# Altium PCB filtroFinal.PcbDoc
Units mm, origin at the board's own origin, x right, y up, seen from the top; angles counter-clockwise.
Board outline 152.4 x 101.6 mm, 2 copper layers (Top Layer, Bottom Layer); 131 components, 101 nets, 357 pads, 43 vias.
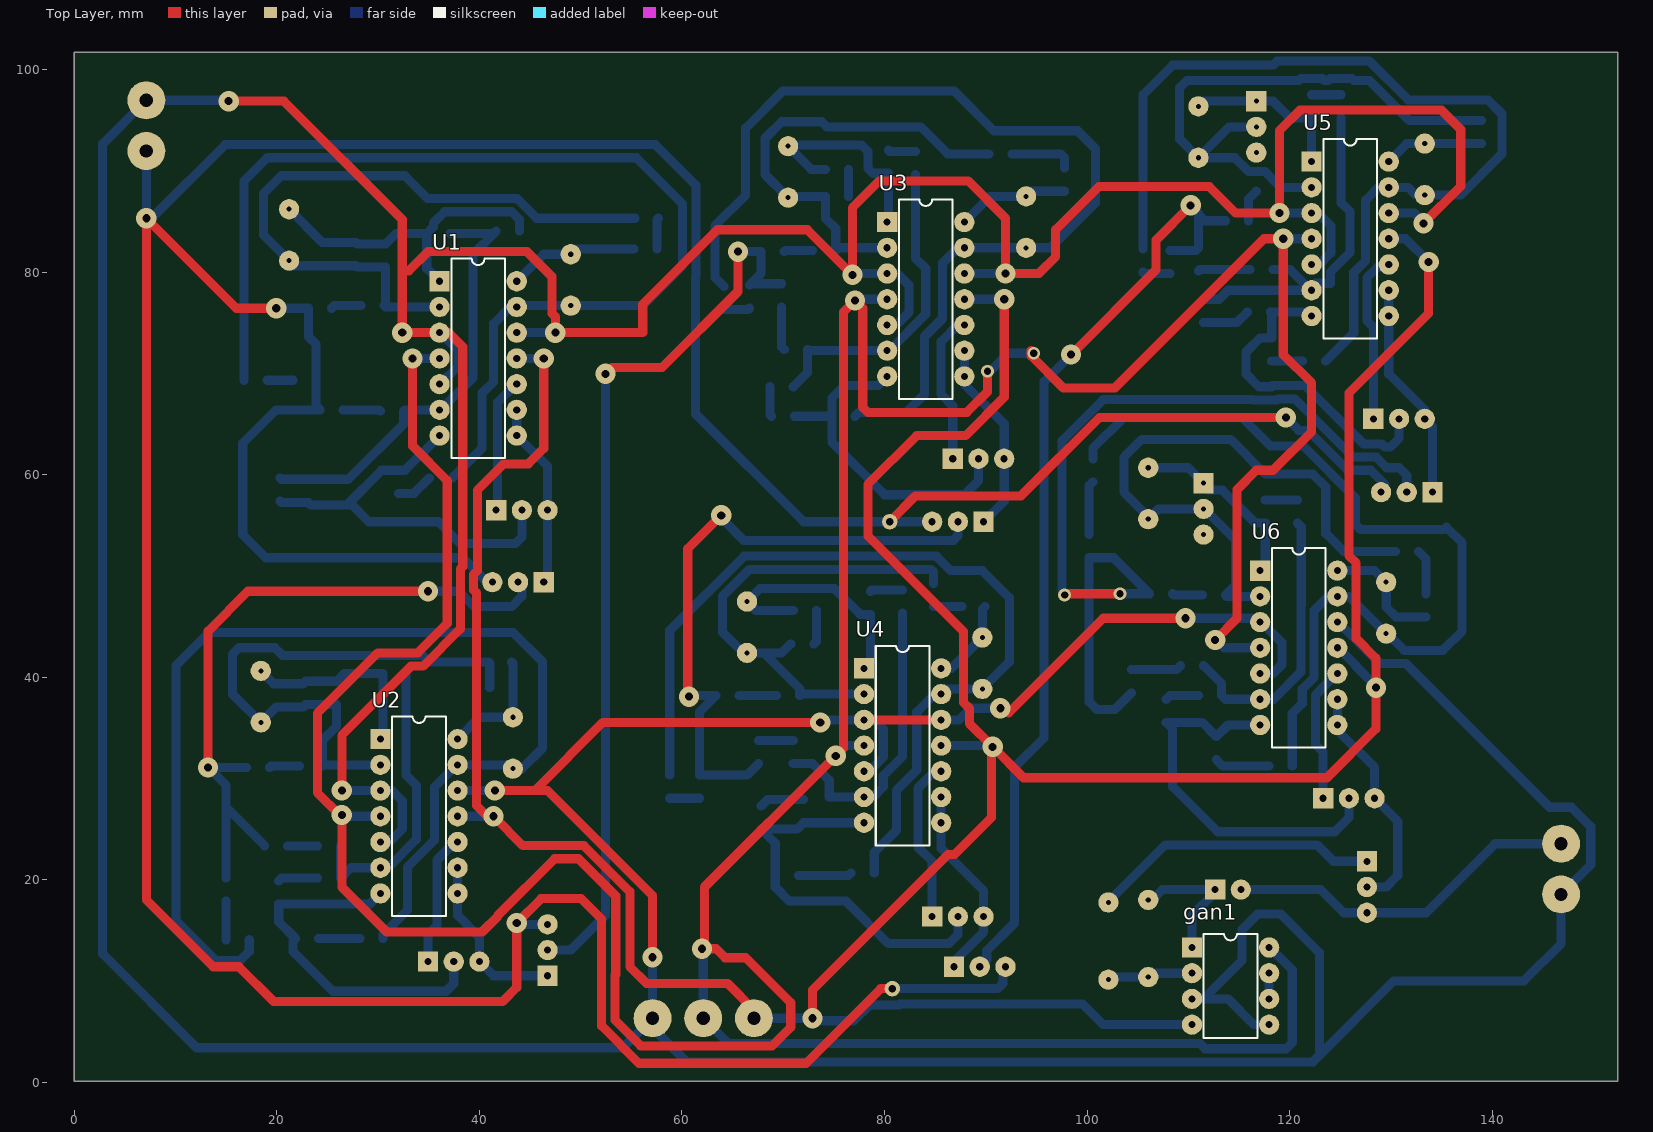
[diagram p0: Top Layer view]
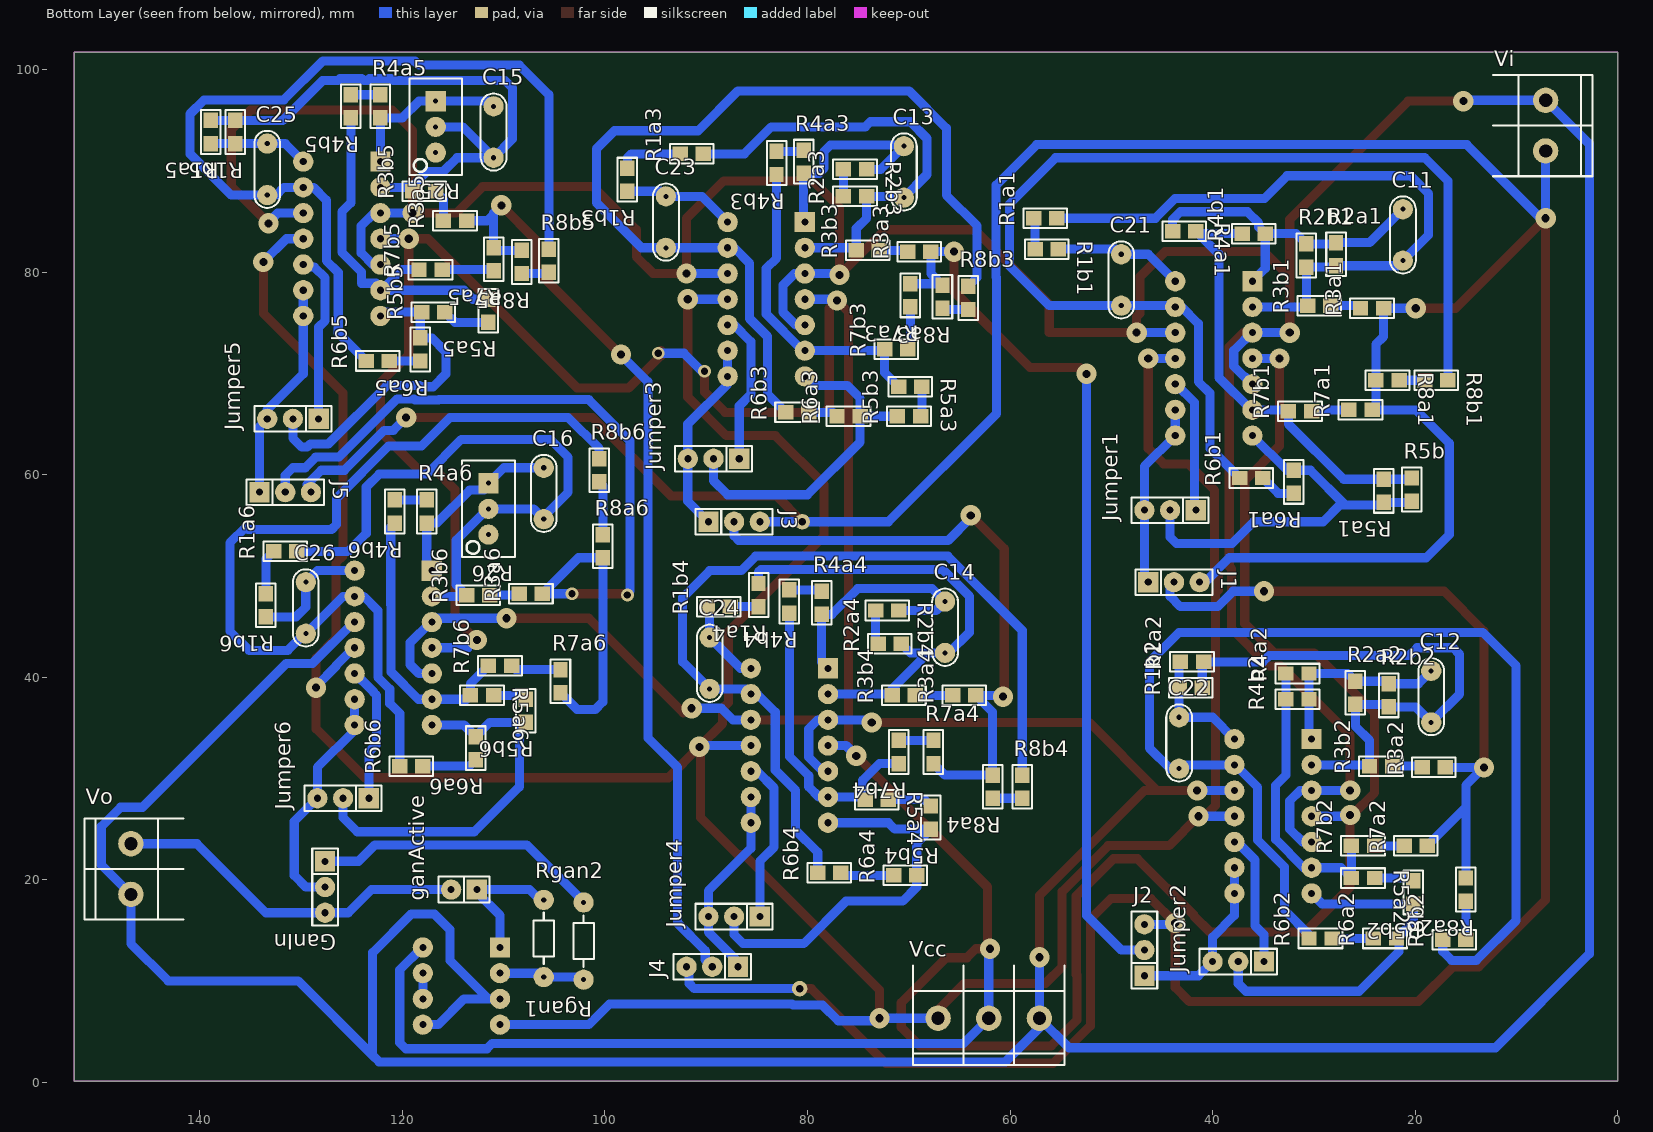
[diagram p1: Bottom Layer view, seen from below]
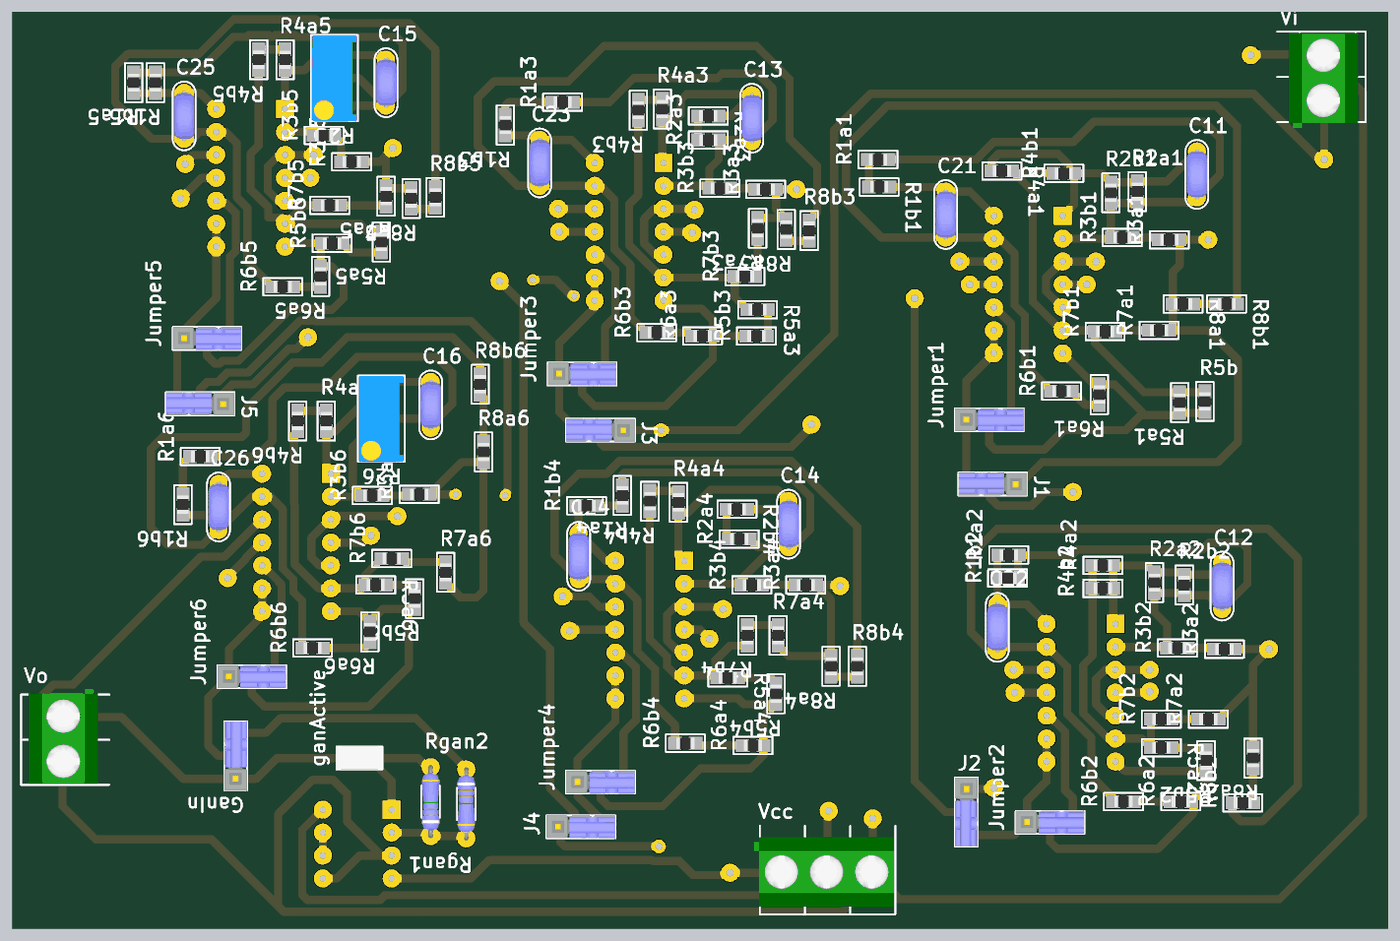
[diagram p2: 3D render of the assembled board from below, using the file's embedded part models]

## Layer stack, top to bottom
Top Solder: solder mask 0.0102, Solder Resist, Dk 3.5
Top Layer: signal copper 0.0356
Dielectric 1: dielectric 0.32, FR-4, Dk 4.8
Bottom Layer: signal copper 0.0356
Bottom Solder: solder mask 0.0102, Solder Resist, Dk 3.5

## Board outline
0,0.127 152.4,0.127 152.4,101.727 0,101.727

## Design rules (kind name [scope] priority, off if disabled: settings)
Clearance [All] p1: gap=0.4 ignorepadtopadclearanceinfootprint=FALSE
PolygonConnect [All] p1: connectstyle=Relief reliefconductorwidth=0.254 reliefentries=4 polygonreliefangle="90 Angle" airgapwidth=0.254
RoutingVias [All] p1: holewidth=0.4 width=2 viastyle="Through Hole" minholewidth=0.3 minwidth=1.8 maxholewidth=0.5 maxwidth=2
SolderMaskExpansion [All] p1: expansion=0.102
Width [All] p1: maxlimit=0.9 minlimit=0.8 preferedwidth=0.9
30 further rules are at their usual default settings.

## Classes and differential pairs
component class filtroFinal-TC: gan1 ganActive GanIn J1 J2 J3 J4 J5 Rgan1 Rgan2 Vcc Vi Vo
component class "Etapa 6": C16 C26 Jumper6 R1a6 R1b6 R3a6 R3b6 R4a6 R4b6 R5a6 R5b6 R6a6 R6b6 R7a6 R7b6 R8a6 R8b6 R26 U6
component class "Etapa 5": C15 C25 Jumper5 R1a5 R1b5 R3a5 R3b5 R4a5 R4b5 R5a5 R5b5 R6a5 R6b5 R7a5 R7b5 R8a5 R8b5 R25 U5
component class "Etapa 4": C14 C24 Jumper4 R1a4 R1b4 R2a4 R2b4 R3a4 R3b4 R4a4 R4b4 R5a4 R5b4 R6a4 R6b4 R7a4 R7b4 R8a4 R8b4 U4
component class "Etapa 3": C13 C23 Jumper3 R1a3 R1b3 R2a3 R2b3 R3a3 R3b3 R4a3 R4b3 R5a3 R5b3 R6a3 R6b3 R7a3 R7b3 R8a3 R8b3 U3
component class "Etapa 2": C12 C22 Jumper2 R1a2 R1b2 R2a2 R2b2 R3a2 R3b2 R4a2 R4b2 R5a2 R5b2 R6a2 R6b2 R7a2 R7b2 R8a2 R8b2 U2
component class "Etapa 1": C11 C21 Jumper1 R1a1 R1b1 R2a1 R2b1 R3a1 R3b1 R4a1 R4b1 R5a1 R5b R6a1 R6b1 R7a1 R7b1 R8a1 R8b1 U1

## Components (designator, comment, footprint, x,y, rotation, side; value= is the part's Value field where it differs from the comment)
C11 "CAP" CAP200 21.209,83.693 r90 bottom
C12 "CAP" CAP200 18.415,38.1 r90 bottom
C13 "CAP" CAP200 70.485,89.916 r90 bottom
C14 "CAP" CAP200 66.421,44.958 r90 bottom
C15 "CAP" CAP200 110.998,93.853 r90 bottom
C16 "CAP" CAP200 106.045,58.166 r90 bottom
C21 "CAP" CAP200 49.022,79.248 r90 bottom
C22 "CAP" CAP200 43.307,33.528 r90 bottom
C23 "CAP" CAP200 93.98,84.963 r90 bottom
C24 "CAP" CAP200 89.662,41.402 r90 bottom
C25 "CAP" CAP200 133.35,90.17 r90 bottom
C26 "CAP" CAP200 129.54,46.863 r90 bottom
gan1 "TL082JG" JG008 114.173,9.525 r270 top
ganActive "JUMPER" JUMPER2 113.919,19.05 r0 bottom
GanIn "JUMPER" JUMPER3 127.635,19.304 r270 bottom
J1 "JUMPER" JUMPER3 43.815,49.403 r180 bottom
J2 "JUMPER" JUMPER3 46.736,13.081 r90 bottom
J3 "JUMPER" JUMPER3 87.249,55.372 r180 bottom
J4 "JUMPER" JUMPER3 89.408,11.43 r0 bottom
J5 "JUMPER" JUMPER3 131.572,58.293 r180 bottom
Jumper1 "JUMPER" JUMPER3 44.196,56.515 r0 bottom
Jumper2 "JUMPER" JUMPER3 37.465,11.938 r0 bottom
Jumper3 "JUMPER" JUMPER3 89.281,61.595 r0 bottom
Jumper4 "JUMPER" JUMPER3 87.249,16.383 r0 bottom
Jumper5 "JUMPER" JUMPER3 130.81,65.532 r0 bottom
Jumper6 "JUMPER" JUMPER3 125.857,28.067 r0 bottom
R1a1 "RES" 0805 56.515,85.344 r0 bottom
R1a2 "RES" 0805 42.037,41.529 r0 bottom
R1a3 "RES" 0805 91.44,91.694 r0 bottom
R1a4 "RES" 0805 84.836,48.133 r270 bottom
R1a5 "RES" 0805 138.938,93.853 r270 bottom
R1a6 "RES" 0805 131.572,52.451 r0 bottom
R1b1 "RES" 0805 56.388,82.296 r180 bottom
R1b2 "RES" 0805 42.164,38.989 r0 bottom
R1b3 "RES" 0805 97.79,89.154 r270 bottom
R1b4 "RES" 0805 88.773,46.99 r0 bottom
R1b5 "RES" 0805 136.525,93.853 r270 bottom
R1b6 "RES" 0805 133.477,47.117 r270 bottom
R2a1 "RES" 0805 27.813,81.788 r90 bottom
R2a2 "RES" 0805 25.908,38.481 r90 bottom
R2a3 "RES" 0805 75.311,87.503 r0 bottom
R2a4 "RES" 0805 71.882,43.307 r0 bottom
R2b1 "RES" 0805 30.734,81.661 r90 bottom
R2b2 "RES" 0805 22.606,38.227 r90 bottom
R2b3 "RES" 0805 75.311,90.17 r180 bottom
R2b4 "RES" 0805 72.136,46.609 r180 bottom
R3a1 "RES" 0805 24.257,76.454 r0 bottom
R3a2 "RES" 0805 18.161,31.115 r0 bottom
R3a3 "RES" 0805 68.961,82.042 r0 bottom
R3a4 "RES" 0805 64.516,38.227 r0 bottom
R3a5 "RES" 0805 114.808,85.09 r0 bottom
R3a6 "RES" 0805 107.315,48.26 r0 bottom
R3b1 "RES" 0805 29.464,76.708 r0 bottom
R3b2 "RES" 0805 23.368,31.242 r0 bottom
R3b3 "RES" 0805 74.041,82.169 r0 bottom
R3b4 "RES" 0805 70.485,38.227 r0 bottom
R3b5 "RES" 0805 117.856,88.011 r0 bottom
R3b6 "RES" 0805 112.522,48.133 r0 bottom
R4a1 "RES" 0805 42.799,84.074 r180 bottom
R4a2 "RES" 0805 31.623,40.386 r0 bottom
R4a3 "RES" 0805 80.391,90.932 r90 bottom
R4a4 "RES" 0805 78.613,47.371 r90 bottom
R4a5 "RES" 0805 122.174,96.393 r90 bottom
R4a6 "RES" 0805 117.602,56.388 r90 bottom
R4b1 "RES" 0805 35.941,83.82 r0 bottom
R4b2 "RES" 0805 31.623,37.846 r0 bottom
R4b3 "RES" 0805 83.058,90.805 r270 bottom
R4b4 "RES" 0805 81.788,47.498 r270 bottom
R4b5 "RES" 0805 125.095,96.393 r270 bottom
R4b6 "RES" 0805 120.777,56.388 r270 bottom
R5a1 "RES" 0805 23.114,58.42 r270 bottom
R5a2 "RES" 0805 25.146,20.193 r180 bottom
R5a3 "RES" 0805 69.85,68.707 r180 bottom
R5a4 "RES" 0805 73.152,27.94 r180 bottom
R5a5 "RES" 0805 111.506,76.2 r270 bottom
R5a6 "RES" 0805 112.141,38.227 r180 bottom
R5b "RES" 0805 20.32,58.547 r270 bottom
R5b2 "RES" 0805 20.193,18.774 r270 bottom
R5b3 "RES" 0805 69.977,65.786 r0 bottom
R5b4 "RES" 0805 67.818,26.162 r270 bottom
R5b5 "RES" 0805 116.967,76.073 r0 bottom
R5b6 "RES" 0805 107.823,36.703 r270 bottom
R6a1 "RES" 0805 32.004,59.309 r270 bottom
R6a2 "RES" 0805 22.987,14.224 r0 bottom
R6a3 "RES" 0805 75.946,65.786 r0 bottom
R6a4 "RES" 0805 70.358,20.447 r0 bottom
R6a5 "RES" 0805 118.237,72.39 r270 bottom
R6a6 "RES" 0805 112.776,33.02 r270 bottom
R6b1 "RES" 0805 36.195,59.69 r0 bottom
R6b2 "RES" 0805 29.337,14.224 r0 bottom
R6b3 "RES" 0805 81.026,66.167 r0 bottom
R6b4 "RES" 0805 77.851,20.701 r0 bottom
R6b5 "RES" 0805 122.428,71.247 r0 bottom
R6b6 "RES" 0805 119.126,31.242 r0 bottom
R7a1 "RES" 0805 25.4,66.421 r0 bottom
R7a2 "RES" 0805 19.939,23.368 r0 bottom
R7a3 "RES" 0805 69.85,77.724 r270 bottom
R7a4 "RES" 0805 67.564,32.639 r90 bottom
R7a5 "RES" 0805 110.998,81.28 r270 bottom
R7a6 "RES" 0805 104.394,39.624 r90 bottom
R7b1 "RES" 0805 31.369,66.294 r0 bottom
R7b2 "RES" 0805 25.146,23.368 r0 bottom
R7b3 "RES" 0805 71.247,72.39 r0 bottom
R7b4 "RES" 0805 70.993,32.639 r270 bottom
R7b5 "RES" 0805 117.221,80.264 r0 bottom
R7b6 "RES" 0805 110.363,41.148 r0 bottom
R8a1 "RES" 0805 22.733,69.342 r180 bottom
R8a2 "RES" 0805 14.986,19.05 r270 bottom
R8a3 "RES" 0805 66.675,77.597 r270 bottom
R8a4 "RES" 0805 61.722,29.21 r270 bottom
R8a5 "RES" 0805 108.204,81.026 r270 bottom
R8a6 "RES" 0805 100.203,52.959 r90 bottom
R8b1 "RES" 0805 17.907,69.342 r180 bottom
R8b2 "RES" 0805 16.129,14.097 r0 bottom
R8b3 "RES" 0805 64.135,77.47 r90 bottom
R8b4 "RES" 0805 58.801,29.21 r90 bottom
R8b5 "RES" 0805 105.537,81.153 r90 bottom
R8b6 "RES" 0805 100.584,60.452 r90 bottom
R25 "PRESET" "PRESET V" 116.713,94.361 r270 bottom
R26 "PRESET" "PRESET V" 111.506,56.642 r270 bottom
Rgan1 "RES" RES300 102.108,17.78 r270 bottom
Rgan2 "RES" RES300 106.045,10.414 r90 bottom
U1 "TL084N" N014 39.878,71.501 r270 top
U2 "TL084N" N014 34.036,26.289 r270 top
U3 "TL084N" N014 84.074,77.343 r270 top
U4 "TL084N" N014 81.788,33.274 r270 top
U5 "TL084N" N014 125.984,83.312 r270 top
U6 "TL084N" N014 120.904,42.926 r270 top
Vcc "BORNERA 3" BORNERA3 62.103,6.35 r90 bottom
Vi "BORNERA 2" BORNERA2 7.112,94.488 r0 bottom
Vo "BORNERA 2" BORNERA2 146.812,21.082 r180 bottom

## Footprints (in the part's own frame and the unit in brackets; to place one, negate y for a bottom-side part, rotate by r counter-clockwise, add the part's x,y. Pads: shape width x height; smd on the part's side, far side on the other; paste and mask are expansions set on the pad)
0805 [mil] "Pasivo 0805"
  rect 60x56 smd: 1(-45,0) 2(45,0)
  silkscreen extent -85,-38 85,38, body extent -40,-24 39,25, height 15
BORNERA2 [mm] "Bornera con Tornillos 5mm separación"
  round 2.5 / inner round 3.75 / far side round 3.75 hole 1.3: 1(0,2.5) 2(0,-2.5)
  silkscreen extent -4.6,-5 5.2,5, body extent -3.76,-4.89 3.94,5.61, height 10
BORNERA3 [mm] "Bornera con Tornillos 5mm separación"
  round 2.5 / inner round 3.75 / far side round 3.75 hole 1.3: 1(0,5) 2(0,0) 3(0,-5)
  silkscreen extent -4.6,-7.5 5.2,7.5, body extent -3.76,-7.39 3.94,8.11, height 10.05
CAP200 [mm]
  round 2 hole 0.5: 1(-2.54,0) 2(2.54,0)
  silkscreen extent -3.81,-1.27 3.81,1.27, body extent -2.79,-1.17 2.79,1.12, height 6.24
JG008 [mm] "DIP; 8 Leads; Row Spacing 7.62 mm; Pitch 2.54 mm"
  rect 2x2 hole 0.7: 1(-3.81,-3.81)
  round 2 hole 0.7: 2(-1.27,-3.81) 3(1.27,-3.81) 4(3.81,-3.81) 5(3.81,3.81) 6(1.27,3.81) 7(-1.27,3.81) 8(-3.81,3.81)
  silkscreen extent -5.15,-2.65 5.15,2.65
JUMPER2 [mm]
  rect 2x2 hole 0.7: 1(-1.27,0)
  round 2 hole 0.7: 2(1.27,0)
  silkscreen extent -2.54,-1.27 2.54,1.27, body extent -2.46,-1.27 2.54,1.27, height 9.5
JUMPER3 [mm]
  rect 2x2 hole 0.7: 1(-2.54,0)
  round 2 hole 0.7: 2(0,0) 3(2.54,0)
  silkscreen extent -3.81,-1.27 3.81,1.27, body extent -3.81,-1.3 3.81,1.27, height 16.15
N014 [mm] "DIP; 14 Leads; Row Spacing 7.62 mm; Pitch 2.54 mm"
  rect 2x2 hole 0.7: 1(-7.62,-3.81)
  round 2 hole 0.7: 2(-5.08,-3.81) 3(-2.54,-3.81) 4(0,-3.81) 5(2.54,-3.81) 6(5.08,-3.81) 7(7.62,-3.81) 8(7.62,3.81) 9(5.08,3.81) 10(2.54,3.81) 11(0,3.81) 12(-2.54,3.81) 13(-5.08,3.81) 14(-7.62,3.81)
  silkscreen extent -9.85,-2.65 9.85,2.65
"PRESET V" [mm]
  rect 2x2 hole 0.5: 1(-2.54,0)
  round 2 hole 0.5: 2(0,0) 3(2.54,0)
  silkscreen extent -4.76,-2.6 4.76,2.6, body extent -4.7,-2.42 4.83,2.42, height 11.55
RES300 [mm]
  round 2 hole 0.5: 1(0,0) 2(7.62,0)
  silkscreen extent 1.27,-1.02 6.35,1.02, body extent -0.25,-0.97 7.87,0.97, height 2.01

## Part data
gan1 U1 U2 U3 U4 U5 U6: "JFET-Input Operational Amplifier", ComponentLink1Description="Manufacturer Link", ComponentLink1URL=http://www.ti.com/, ComponentLink2Description=Datasheet, DatasheetVersion=Feb-1999, LatestRevisionDate=04-Mar-2005, LatestRevisionNote="Stylized 3D Model Added.", Published=16-Jan-2001, Publisher="Altium Limited"
  gan1: ComponentLink2URL=http://www-s.ti.com/sc/ds/tl082.pdf, PackageDescription="DIP; 8 Leads; Row Spacing 7.62 mm; Pitch 2.54 mm", PackageReference=JG008, PackageVersion=Jan-1995
  U1 U2 U3 U4 U5 U6: ComponentLink2URL=http://www-s.ti.com/sc/ds/tl084.pdf, PackageDescription="DIP; 14 Leads; Row Spacing 7.62 mm; Pitch 2.54 mm", PackageReference=N014, PackageVersion=Oct-1995
GanIn J1 J2 J3 J4 J5 Jumper1 Jumper2 Jumper3 Jumper4 Jumper5 Jumper6: library part JUMPER3

## Free pads (board coordinates)
  round 1.524 hole 0.762: 3(80.518,55.372) 4(80.772,9.271)

## Via types
v1: diameter 2, hole 0.8, Top Layer to Bottom Layer, 39 vias
v2: diameter 1.27, hole 0.711, Top Layer to Bottom Layer, 4 vias

## Nets (pads, with @x,y where several pads share a name; then routed paths per layer and width w, separated by ;. In a path a pad name is that pad's centre, name@x,y a point inside that pad or via, vN(x,y) a via of type N, cw(c..) or ccw(c..) an arc to the next point about the centre after c; other vN are vias at no path point)
+VCC: gan1.4 U1.11 U2.11 U3.11 U4.11 U5.11 U6.11 Vcc.1 | length 343.2
  Top Layer w0.9: v1(46.355,71.501) 46.355,62.611 44.831,61.087 42.418,61.087 39.806,58.475 39.806,50.55 39.425,50.169 39.425,48.637 39.696,48.366 39.696,27.36 40.767,26.289 v1(41.402,26.289) 44.293,23.398 50.322,23.398 54.864,18.856 54.864,11.43 56.515,9.779 64.516,9.779 67.103,7.192 Vcc.1 ; v1(72.898,6.35) 72.898,9.144 86.258,22.504 86.903,22.504 90.551,26.152 90.551,33.02 v1(90.678,33.147) ; v1(91.821,77.343) 91.821,67.691 88.011,63.881 83.185,63.881 78.359,59.055 78.359,53.975 87.812,44.522 87.812,37.516 88.392,36.936 88.392,35.433 v1(90.678,33.147) ; v1(133.731,81.026) 133.731,75.946 125.857,68.072 125.857,52.019 126.564,51.312 126.564,43.849 128.524,41.889 v1(128.524,38.989) 128.524,34.925 123.698,30.099 93.726,30.099 v1(90.678,33.147)
  Bottom Layer w0.9: U2.11 v1(41.402,26.289) ; U1.11 v1(46.355,71.501) ; Vcc.1 v1@72.517,6.35 ; v1(72.898,6.35) 73.152,6.096 76.962,6.096 78.525,7.659 81.44,7.659 81.528,7.747 99.568,7.747 101.6,5.715 gan1.4 ; U4.11 v1@90.424,33.274 ; U3.11 v1(91.821,77.343) ; U6.11 124.79,42.926 126.564,41.152 126.564,41.076 128.524,39.116 v1(128.524,38.989) ; U5.11 131.445,83.312 v1(133.731,81.026)
-VCC: gan1.8 U1.4 U2.4 U3.4 U4.4 U5.4 U6.4 Vcc.2 | length 416.3
  Top Layer w0.9: v1(33.401,71.501) 33.401,62.848 36.825,59.424 36.825,45.334 33.909,42.418 29.972,42.418 24.003,36.449 24.003,28.626 26.213,26.416 v1(26.416,26.416) 26.416,19.304 30.861,14.859 40.259,14.859 41.838,16.438 41.838,16.514 47.422,22.098 49.784,22.098 53.467,18.415 53.467,10.668 53.4,10.601 53.4,6.163 55.938,3.625 68.903,3.625 70.739,5.461 70.739,7.874 66.294,12.319 64.262,12.319 63.373,13.208 v1(61.976,13.208) 62.23,13.462 62.23,19.304 v1(75.184,32.258) 75.946,33.02 75.946,76.073 v1(77.089,77.216) 77.851,76.454 77.851,66.675 78.359,66.167 88.138,66.167 90.17,68.199 v2(90.17,70.231) ; U1.4 U1.4@36.576,71.501 ; v2@94.488,72.263 94.488,71.755 97.663,68.58 102.743,68.58 117.475,83.312 v1(119.38,83.312) 119.38,71.882 122.174,69.088 122.174,64.262 118.364,60.452 116.713,60.452 114.808,58.547 114.808,45.847 v1(112.649,43.688)
  Bottom Layer w0.9: v1@26.543,26.289 U2.4 ; v1(33.401,71.501) U1.4 ; v1@62.103,12.827 Vcc.2 64.588,3.865 111.129,3.865 111.662,3.332 119.664,3.332 120.269,3.937 120.269,11.125 118.059,13.335 gan1.8 ; v1(75.184,32.258) 76.2,33.274 U4.4 ; v1@77.216,77.343 U3.4 ; v2@90.424,70.231 92.202,72.009 v2(94.742,72.009) ; 113.538,42.926 U6.4 ; v1@119.761,83.312 U5.4
GND: gan1.3 gan1.5 U1.3 U1.5 U1.12 U2.3 U2.5 U2.12 U3.3 U3.5 U3.12 U4.3 U4.5 U4.12 U5.3 U5.5 U5.12 U6.3 U6.5 U6.12 Vcc.3 Vi.2 Vo.2 | length 769.1
  Top Layer w0.9: v1(15.24,96.901) 20.701,96.901 32.385,85.217 32.385,80.137 ; v1(26.416,28.829) 26.416,34.29 33.244,41.118 34.447,41.118 38.125,44.796 38.125,50.708 38.354,50.937 38.354,72.644 36.957,74.041 U1.3 v1(32.385,74.041) 32.385,80.137 ; v1@40.996,28.829 v1(41.529,28.829) 45.466,28.829 ; v1(57.103,12.366) 57.103,18.462 46.736,28.829 45.466,28.829 ; v1(73.66,35.56) 52.197,35.56 45.466,28.829 ; U4.3 U4.12 ; v1(91.44,36.957) 91.44,36.576 91.821,36.957 92.266,36.512 101.6,45.847 v1(109.728,45.847) ; v1(133.223,84.836) 136.906,88.519 136.906,94.107 135.001,96.012 121.031,96.012 118.999,93.98 v1(118.999,85.852) 114.681,85.852 112.069,88.464 101.164,88.464 96.901,84.201 96.901,81.534 95.25,79.883 v1(91.948,79.883) 91.948,85.344 88.265,89.027 79.502,89.027 76.835,86.36 v1(76.835,79.756) 72.39,84.201 63.5,84.201 56.134,76.835 56.134,74.041 v1(47.498,74.041) 47.498,75.616 47.172,75.942 47.172,79.574 44.704,82.042 34.925,82.042 33.02,80.137 32.385,80.137
  Bottom Layer w0.9: v1@14.819,96.988 Vi.2 2.794,92.67 2.794,12.7 12.065,3.429 54.182,3.429 Vcc.3 ; v1(26.416,28.829) U2.3 31.369,28.829 32.385,27.813 32.385,25.019 31.115,23.749 U2.5 ; v1(32.385,74.041) U1.3 36.758,73.351 36.834,73.351 37.918,72.267 37.918,70.735 36.834,69.651 36.758,69.651 U1.5 ; U2.12 v1(41.529,28.829) ; U1.12 v1@46.99,74.041 ; v1(57.103,12.366) Vcc.3 ; v1@73.533,35.814 U4.3 78.994,35.814 79.883,34.925 79.883,32.131 78.486,30.734 U4.5 ; v1@77.089,79.883 U3.3 81.28,79.883 82.423,78.74 82.423,76.073 81.153,74.803 U3.5 ; U4.12 87.376,35.814 88.519,36.957 v1(91.44,36.957) ; U3.12 v1(91.948,79.883) ; v1(109.728,45.847) 116.713,45.847 U6.3 117.221,45.466 119.253,43.434 119.253,41.275 118.364,40.386 U6.5 ; gan1.3 111.506,8.255 ; gan1.5 116.459,5.715 113.919,8.255 111.506,8.255 ; v1@119.253,85.852 U5.3 122.809,85.852 124.079,84.582 124.079,81.915 122.936,80.772 U5.5 ; U6.12 124.79,45.466 128.884,41.372 131.475,41.372 145.669,27.178 147.828,27.178 149.733,25.273 149.733,21.503 Vo.2 146.812,13.716 143.129,10.033 130.302,10.033 122.936,2.667 ; U5.12 132.334,85.852 v1@132.969,85.217 ; Vcc.3 57.103,5.381 60.452,2.032 122.301,2.032 122.936,2.667 ; 111.506,8.255 115.316,12.065 115.316,15.113 116.84,16.637 119.126,16.637 122.936,12.827 122.936,2.667
NetC11_1: C11.1 R1a1.1 R2a1.1 R2b1.1 R3b1.2 U1.2 | length 66
  Bottom Layer w0.9: U1.2 30.734,76.581 R3b1.2 30.734,76.835 R2b1.1 27.94,80.518 R2a1.1 21.717,80.645 C11.1 18.669,83.693 18.669,87.757 20.447,89.535 32.639,89.535 34.895,87.279 43.718,87.279 45.653,85.344 R1a1.1
NetC11_2: C11.2 R2a1.2 R2b1.2 R4a1.1 R4b1.1 U1.1 | length 32.4
  Bottom Layer w0.9: C11.2 24.511,82.931 R2a1.2 27.94,82.804 R2b1.2 31.75,83.82 R4b1.1 ; U1.1 34.798,80.391 R4b1.1 ; R4a1.1 43.942,85.217 43.18,85.979 36.568,85.979 35.472,84.883 35.472,84.494 R4b1.1
NetC12_1: C12.1 R1a2.1 R1b2.1 R2a2.1 R2b2.1 R3b2.2 U2.2 | length 57.3
  Bottom Layer w0.9: U2.2 24.638,31.369 R3b2.2 24.511,33.782 25.908,35.179 R2a2.1 22.86,37.338 R2b2.1 19.939,37.084 C12.1 15.621,38.354 15.621,42.291 16.256,42.926 19.812,42.926 20.574,42.164 34.417,42.164 35.052,41.529 R1a2.1 41.021,41.402 R1b2.1
NetC12_2: C12.2 R2a2.2 R2b2.2 R4a2.1 R4b2.1 U2.1 | length 19.6
  Bottom Layer w0.9: C12.2 19.685,39.37 R2b2.2 22.86,39.624 R2a2.2 26.67,40.386 R4a2.1 R4b2.1 30.48,34.163 U2.1
NetC13_1: C13.1 R1a3.1 R2a3.1 R3b3.2 U3.2 | length 45.6
  Bottom Layer w0.9: U3.2 75.438,82.423 R3b3.2 75.184,84.328 74.168,85.344 R2a3.1 70.612,87.503 C13.1 68.199,89.662 68.199,93.218 69.85,94.869 73.787,94.869 74.295,94.361 83.566,94.361 86.233,91.694 R1a3.1
NetC13_2: C13.2 R2b3.2 R4a3.1 U3.1 | length 21.6
  Bottom Layer w0.9: R2b3.2 72.771,90.17 C13.2 70.612,92.583 77.724,92.583 78.359,91.948 78.359,90.297 78.867,89.789 R4a3.1 80.391,85.09 U3.1
NetC14_1: C14.1 R1a4.1 R2a4.1 R3b4.2 U4.2 | length 46.7
  Bottom Layer w0.9: R2a4.1 69.85,42.418 68.072,42.418 ; U4.2 71.755,38.354 R3b4.2 71.628,38.862 68.072,42.418 ; R1a4.1 84.836,50.419 84.582,50.673 66.675,50.673 64.008,48.006 64.008,44.45 66.04,42.418 C14.1 68.072,42.418
NetC14_2: C14.2 R2b4.2 R4a4.1 U4.1 | length 24.3
  Bottom Layer w0.9: R2b4.2 67.31,46.609 C14.2 67.691,48.768 75.057,48.768 77.597,46.228 R4a4.1 78.613,41.529 U4.1
NetC15_1: C15.1 R1a5.1 R1b5.1 R3b5.2 R25.2 U5.2 | length 59.7
  Bottom Layer w0.9: R25.2 114.046,94.361 C15.1 ; U5.2 119.38,88.392 R3b5.2 118.999,88.519 117.547,89.971 115.947,89.971 114.605,91.313 C15.1 ; R1a5.1 R1b5.1 131.826,94.996 127.889,98.933 126.373,98.933 126.158,99.148 124.032,99.148 123.817,98.933 123.452,98.933 123.237,99.148 121.111,99.148 120.896,98.933 109.855,98.933 109.148,98.226 109.148,93.163 C15.1
NetC15_2: C15.2 R4a5.1 R25.1 U5.1 | length 16.4
  Bottom Layer w0.9: C15.2 111.506,96.901 R25.1 118.364,96.901 120.015,95.25 R4a5.1 U5.1
NetC16_1: C16.1 R1a6.1 R3b6.2 R26.2 U6.2 | length 61.5
  Bottom Layer w0.9: U6.2 113.792,48.006 R3b6.2 114.681,49.149 114.681,53.543 111.582,56.642 R26.2 107.061,56.642 C16.1 106.045,55.88 103.632,58.293 103.632,61.722 105.41,63.5 114.173,63.5 117.602,60.071 122.301,60.071 123.571,58.801 123.571,54.229 125.349,52.451 R1a6.1
NetC16_2: C16.2 R4a6.1 R26.1 U6.1 | length 18.9
  Bottom Layer w0.9: C16.2 109.982,60.706 R26.1 111.506,58.928 111.942,58.492 113.356,58.492 116.603,55.245 R4a6.1 117.602,51.054 U6.1
NetC21_1: C21.1 R6b1.2 R8b1.2 U1.13 | length 109.9
  Bottom Layer w0.9: R8b1.2 16.764,89.027 19.05,91.313 55.499,91.313 60.071,86.741 60.071,80.645 56.134,76.708 C21.1 43.815,76.708 U1.13 43.053,76.581 41.402,74.93 41.402,69.215 40.259,68.072 40.259,62.611 R6b1.2
NetC21_2: C21.2 R1b1.2 U1.14 | length 12.9
  Bottom Layer w0.9: U1.14 46.355,81.788 C21.2 49.53,82.296 R1b1.2
NetC22_1: C22.1 R6b2.2 R8b2.2 U2.13 | length 112.4
  Bottom Layer w0.9: R8b2.2 17.272,12.954 16.383,12.065 13.97,12.065 10.033,16.002 10.033,41.148 13.335,44.45 43.307,44.45 46.228,41.529 46.228,33.02 44.196,30.988 C22.1 42.926,30.988 42.545,31.369 U2.13 37.77,31.369 35.56,29.159 35.56,23.943 32.893,21.276 32.893,17.018 30.48,14.605 R6b2.2
NetC22_2: C22.2 R1a2.2 R1b2.2 U2.14 | length 11.9
  Bottom Layer w0.9: U2.14 40.005,36.068 C22.2 R1b2.2 43.307,41.402 R1a2.2
NetC23_1: C23.1 R6b3.2 R8b3.2 U3.13 | length 94.8
  Bottom Layer w0.9: R8b3.2 63.246,79.502 63.246,84.582 66.294,87.63 66.294,94.234 69.977,97.917 86.868,97.917 90.805,93.98 99.06,93.98 100.838,92.202 100.838,86.868 96.393,82.423 C23.1 U3.13 87.249,82.423 85.725,80.899 85.725,75.438 83.947,73.66 83.947,67.945 R6b3.2
NetC23_2: C23.2 R1b3.2 U3.14 | length 11.2
  Bottom Layer w0.9: U3.14 90.424,87.503 C23.2 94.488,88.011 R1b3.2
NetC24_1: C24.1 R6b4.2 R8b4.2 U4.13 | length 87.7
  Bottom Layer w0.9: R8b4.2 58.801,44.637 66.137,51.973 85.12,51.973 86.547,50.546 89.662,50.546 92.329,47.879 92.329,41.529 C24.1 86.106,38.862 U4.13 84.963,38.354 83.185,36.576 83.185,30.861 81.183,28.859 81.183,24.922 78.994,22.733 R6b4.2
NetC24_2: C24.2 R1b4.2 U4.14 | length 8.5
  Bottom Layer w0.9: U4.14 86.614,40.894 C24.2 89.662,46.736 R1b4.2
NetC25_1: C25.1 R6b5.2 R8b5.2 U5.13 | length 91.7
  Bottom Layer w0.9: R8b5.2 105.537,97.536 108.458,100.457 118.364,100.457 118.775,100.868 127.859,100.868 131.699,97.028 139.581,97.028 140.978,95.631 140.978,91.702 136.906,87.63 C25.1 132.461,87.63 131.699,88.392 U5.13 128.778,88.392 127.508,87.122 127.508,81.158 126.335,79.985 126.335,74.011 R6b5.2
NetC25_2: C25.2 R1a5.2 R1b5.2 U5.14 | length 9.9
  Bottom Layer w0.9: U5.14 131.572,92.71 C25.2 R1b5.2 R1a5.2
NetC26_1: C26.1 R6b6.2 R8b6.2 U6.13 | length 88.7
  Bottom Layer w0.9: R8b6.2 100.584,62.611 103.632,65.659 115.316,65.659 118.11,62.865 121.345,62.865 126.492,57.718 126.492,55.118 127,54.61 135.255,54.61 135.479,54.834 137.033,53.28 137.033,44.577 135.128,42.672 131.318,42.672 129.667,44.323 C26.1 125.857,48.006 U6.13 123.825,48.006 122.428,46.609 122.428,40.015 121.255,38.842 121.255,37.435 120.269,36.449 R6b6.2
NetC26_2: C26.2 R1b6.2 U6.14 | length 12.1
  Bottom Layer w0.9: U6.14 128.397,50.546 C26.2 129.54,46.939 130.505,45.974 R1b6.2
Netgan1_1: gan1.1 ganActive.1 Rgan2.2 | length 13.7
  Bottom Layer w0.9: Rgan2.2 106.426,18.034 107.442,19.05 ganActive.1 112.649,18.796 110.363,16.51 gan1.1
Netgan1_2: gan1.2 Rgan1.2 Rgan2.1 | length 8.5
  Bottom Layer w0.9: Rgan1.2 102.362,10.414 Rgan2.1 106.426,10.795 gan1.2
Netgan1_6: gan1.6 gan1.7 | length 2.5
  Bottom Layer w0.9: gan1.6 gan1.7
NetGanIn_1: GanIn.1 Rgan1.1 | length 28.6
  Bottom Layer w0.9: Rgan1.1 102.108,17.847 107.726,23.465 122.712,23.465 124.333,21.844 GanIn.1
NetJumper1_1: Jumper1.1 U1.10 | length 13.3
  Bottom Layer w0.9: Jumper1.1 41.783,56.642 41.783,67.132 43.612,68.961 U1.10
NetJumper2_1: Jumper2.1 U2.10 | length 13.2
  Bottom Layer w0.9: Jumper2.1 34.925,14.605 35.814,15.494 35.814,21.971 37.592,23.749 U2.10
NetJumper3_1: Jumper3.1 U3.10 | length 15
  Bottom Layer w0.9: Jumper3.1 86.741,66.802 85.598,67.945 85.598,73.152 87.249,74.803 U3.10
NetJumper4_1: Jumper4.1 U4.10 | length 16.2
  Bottom Layer w0.9: Jumper4.1 84.709,21.844 83.312,23.241 83.312,29.083 84.963,30.734 U4.10
NetJumper5_1: Jumper5.1 U5.10 | length 16.9
  Bottom Layer w0.9: Jumper5.1 128.27,74.6 127.635,75.235 127.635,79.447 128.706,80.518 129.54,80.518 U5.10
NetJumper6_1: Jumper6.1 U6.10 | length 13.6
  Bottom Layer w0.9: Jumper6.1 123.317,32.639 122.555,33.401 122.555,38.227 122.864,38.536 122.864,38.612 123.948,39.696 124.024,39.696 U6.10
NetR1a1_2: R1a1.2 R1b1.1 | length 3.1
  Bottom Layer w0.9: R1b1.1 57.531,85.217 R1a1.2
NetR1a3_2: R1a3.2 R1b3.1 | length 6.4
  Bottom Layer w0.9: R1a3.2 97.409,91.694 97.79,91.313 R1b3.1
NetR1a4_2: R1a4.2 R1b4.1 | length 2.8
  Bottom Layer w0.9: R1a4.2 R1b4.1
NetR1a6_2: R1a6.2 R1b6.1 | length 4.5
  Bottom Layer w0.9: R1a6.2 133.477,51.689 R1b6.1
NetR2a3_2: R2a3.2 R2b3.1 | length 2.7
  Bottom Layer w0.9: R2a3.2 R2b3.1
NetR2a4_2: R2a4.2 R2b4.1 | length 3.4
  Bottom Layer w0.9: R2a4.2 73.279,43.561 R2b4.1
NetR3a1_2: R3a1.2 R3b1.1 | length 3
  Bottom Layer w0.9: R3a1.2 25.654,76.708 R3b1.1
NetR3a2_2: R3a2.2 R3b2.1 | length 3
  Bottom Layer w0.9: R3a2.2 19.431,31.242 R3b2.1
NetR3a3_2: R3a3.2 R3b3.1 | length 2.8
  Bottom Layer w0.9: R3a3.2 70.231,82.169 R3b3.1
NetR3a4_2: R3a4.2 R3b4.1 | length 3.7
  Bottom Layer w0.9: R3a4.2 R3b4.1
NetR3a5_2: R3a5.2 R3b5.1 | length 3.2
  Bottom Layer w0.9: R3a5.2 115.951,87.249 R3b5.1
NetR3a6_2: R3a6.2 R3b6.1 | length 3
  Bottom Layer w0.9: R3a6.2 108.585,48.133 R3b6.1
NetR4a1_2: R4a1.2 R4b1.2 R5a1.1 R5b.1 R7b1.2 U1.6 | length 43.7
  Bottom Layer w0.9: R5b.1 20.447,59.563 R5a1.1 27.051,59.563 32.512,65.024 R7b1.2 32.639,66.421 U1.6 36.195,66.421 39.37,69.596 39.37,81.788 R4a1.2@41.402,83.82 ; R4b1.2 R4a1.2@41.402,83.82 ; R4a1.2 R4a1.2@41.402,83.82
NetR4a2_2: R4a2.2 R4b2.2 R5a2.1 R7b2.2 U2.6 | length 29
  Bottom Layer w0.9: R7b2.2 R5a2.1 27.305,21.209 U2.6 30.988,21.209 33.782,24.003 33.782,29.337 32.766,30.353 R4b2.2 R4a2.2
NetR4a3_2: R4a3.2 R4b3.1 | length 2.7
  Bottom Layer w0.9: R4a3.2 80.518,91.948 R4b3.1
NetR4a4_2: R4a4.2 R4b4.1 | length 3.2
  Bottom Layer w0.9: R4a4.2 78.74,48.641 R4b4.1
NetR4a5_2: R4a5.2 R4b5.1 | length 2.9
  Bottom Layer w0.9: R4a5.2 R4b5.1
NetR4a6_2: R4a6.2 R4b6.1 | length 3.2
  Bottom Layer w0.9: R4a6.2 R4b6.1
NetR4b3_2: R4b3.2 R5a3.1 R7b3.2 U3.6 | length 31.7
  Bottom Layer w0.9: R5a3.1 72.39,70.104 R7b3.2 72.517,72.263 U3.6 80.451,72.263 84.074,75.886 84.074,80.391 83.058,81.407 R4b3.2
NetR4b4_2: R4b4.2 R5a4.1 R7b4.2 U4.6 | length 29.6
  Bottom Layer w0.9: R7b4.2 72.898,31.496 74.549,29.845 74.549,28.194 U4.6 78.867,28.194 79.883,29.21 79.883,30.293 81.788,32.198 R4b4.2
NetR4b5_2: R4b5.2 R5a5.1 R7b5.2 U5.6 | length 35.4
  Bottom Layer w0.9: R5a5.1 113.03,77.343 113.919,78.232 U5.6@122.098,78.232 ; R7b5.2 120.066,80.264 U5.6@122.098,78.232 ; R4b5.2 125.095,86.868 125.984,85.979 125.984,81.982 124.024,80.022 124.024,78.922 122.61,78.922 122.174,78.486 U5.6 U5.6@122.098,78.232
NetR4b6_2: R4b6.2 R5a6.1 R7b6.2 U6.6 | length 27.6
  Bottom Layer w0.9: R7b6.2 113.284,39.37 R5a6.1 113.665,37.846 U6.6 118.421,37.846 121.128,40.553 121.128,47.147 121.158,47.177 121.158,54.864 R4b6.2
NetR5a2_2: R5a2.2 R5b2.1 | length 3.9
  Bottom Layer w0.9: R5b2.1 20.469,20.193 R5a2.2
NetR5a3_2: R5a3.2 R5b3.1 | length 3
  Bottom Layer w0.9: R5a3.2 68.707,65.913 R5b3.1
NetR5a4_2: R5a4.2 R5b4.1 | length 4.5
  Bottom Layer w0.9: R5b4.1 68.453,27.94 R5a4.2
NetR5a5_2: R5a5.2 R5b5.1 | length 4.7
  Bottom Layer w0.9: R5a5.2 114.808,75.057 R5b5.1
NetR5a6_2: R5a6.2 R5b6.1 | length 3.3
  Bottom Layer w0.9: R5b6.1 108.204,38.227 R5a6.2
NetR6a1_2: R6a1.2 R6b1.1 | length 3.7
  Bottom Layer w0.9: R6a1.2 33.528,58.166 R6b1.1
NetR6a2_2: R6a2.2 R6b2.1 | length 4.1
  Bottom Layer w0.9: R6a2.2 R6b2.1
NetR6a3_2: R6a3.2 R6b3.1 | length 3
  Bottom Layer w0.9: R6a3.2 77.47,66.167 R6b3.1
NetR6a4_2: R6a4.2 R6b4.1 | length 5.3
  Bottom Layer w0.9: R6a4.2 76.454,20.447 R6b4.1
NetR6a5_2: R6a5.2 R6b5.1 | length 3
  Bottom Layer w0.9: R6a5.2 R6b5.1
NetR6a6_2: R6a6.2 R6b6.1 | length 5.5
  Bottom Layer w0.9: R6a6.2 113.411,31.242 R6b6.1
NetR7a1_2: R7a1.2 R7b1.1 | length 3.7
  Bottom Layer w0.9: R7a1.2 30.099,66.421 R7b1.1
NetR7a2_2: R7a2.2 R7b2.1 | length 2.9
  Bottom Layer w0.9: R7a2.2 R7b2.1
NetR7a3_2: R7a3.2 R7b3.1 | length 4.3
  Bottom Layer w0.9: R7a3.2 69.85,72.644 R7b3.1
NetR7a4_2: R7a4.2 R7b4.1 | length 3.4
  Bottom Layer w0.9: R7a4.2 R7b4.1
NetR7a5_2: R7a5.2 R7b5.1 | length 5.1
  Bottom Layer w0.9: R7a5.2 111.125,80.264 R7b5.1
NetR7a6_2: R7a6.2 R7b6.1 | length 5
  Bottom Layer w0.9: R7a6.2 108.839,40.767 R7b6.1
NetR8a1_2: R8a1.2 R8b1.1 | length 2.5
  Bottom Layer w0.9: R8b1.1 R8a1.2
NetR8a2_2: R8a2.2 R8b2.1 | length 3.8
  Bottom Layer w0.9: R8b2.1 R8a2.2
NetR8a3_2: R8a3.2 R8b3.1 | length 2.6
  Bottom Layer w0.9: R8b3.1 66.548,76.327 R8a3.2
NetR8a4_2: R8a4.2 R8b4.1 | length 2.9
  Bottom Layer w0.9: R8b4.1 R8a4.2
NetR8a5_2: R8a5.2 R8b5.1 | length 2.7
  Bottom Layer w0.9: R8b5.1 105.664,79.883 R8a5.2
NetR8a6_2: R8a6.2 R8b6.1 | length 5.4
  Bottom Layer w0.9: R8a6.2 100.203,58.928 R8b6.1
Vi: J1.3 J2.3 J3.3 J4.3 J5.3 pad.3 pad.4 R3a1.1 R7a1.1 R8a1.1 Vi.1 | length 433.1
  Top Layer w0.9: v1@7.62,85.344 v1(7.112,85.344) ; v1(19.939,76.454) 16.002,76.454 v1(7.112,85.344) ; pad.3 83.058,57.912 93.472,57.912 101.219,65.659 v1(119.634,65.659) ; pad.4 79.629,9.271 72.263,1.905 55.753,1.905 52.07,5.588 52.07,16.129 50.038,18.161 46.101,18.161 v1(43.688,15.748) 43.688,9.398 42.291,8.001 19.685,8.001 16.256,11.43 13.716,11.43 7.112,18.034 v1(7.112,85.344)
  Bottom Layer w0.9: Vi.1 v1(7.112,85.344) 7.62,85.344 14.889,92.613 57.374,92.613 61.371,88.616 61.371,79.532 61.341,79.502 61.341,66.04 72.009,55.372 pad.3 J3.3 ; v1(19.939,76.454) R3a1.1 23.114,73.66 23.876,72.898 R8a1.1 23.876,66.802 R7a1.1 19.939,66.421 16.637,63.119 16.637,54.102 18.923,51.816 38.354,51.816 J1.3@40.894,49.276 ; v1@43.942,15.621 J2.3 J2.3@46.609,15.748 ; pad.4 91.186,9.271 91.694,9.779 91.694,11.684 J4.3@91.567,11.811 ; v1(119.634,65.659) 120.904,64.389 121.793,64.389 125.73,60.452 128.016,60.452 129.413,59.055 129.032,59.055 J5.3
Vi(E2): J1.2 R3a2.1 R7a2.1 R8a2.1 | length 68.9
  Top Layer w0.9: v1(13.208,31.115) 13.208,44.577 17.145,48.514 v1(34.925,48.514)
  Bottom Layer w0.9: v1(13.208,31.115) 14.986,29.337 14.986,27.178 ; v1@13.589,31.115 R3a2.1 ; R8a2.1 14.986,27.178 ; R7a2.1 14.986,27.178 ; v1(34.925,48.514) 37.973,48.514 39.497,46.99 43.18,46.99 44.196,48.006 J1.2@44.196,49.276
Vi(E3): J2.2 R3a3.1 R7a3.1 R8a3.1 | length 89.8
  Top Layer w0.9: v1(52.451,69.977) 53.086,70.612 58.039,70.612 65.532,78.105 v1(65.532,82.042)
  Bottom Layer w0.9: J2.2 49.022,13.081 52.451,16.51 v1(52.451,69.977) ; v1@65.786,82.042 R3a3.1 67.818,79.883 R8a3.1@66.802,78.867 ; R8a3.1 R8a3.1@66.802,78.867 ; R7a3.1 R8a3.1@66.802,78.867
Vi(E4): J3.2 R3a4.1 R7a4.1 R8a4.1 | length 62.9
  Top Layer w0.9: v1(60.706,38.1) 60.579,38.227 60.579,52.705 v1(63.881,56.007)
  Bottom Layer w0.9: v1@60.833,38.227 R3a4.1 61.722,36.576 R8a4.1 66.421,30.353 R7a4.1 ; v1(63.881,56.007) 63.881,55.753 66.112,53.522 86.796,53.522 87.249,53.975 J3.2
Vi(E5): J4.2 R3a5.1 R7a5.1 R8a5.1 | length 94.1
  Top Layer w0.9: v1(98.425,71.882) 106.807,80.264 106.807,83.185 v1(110.236,86.614)
  Bottom Layer w0.9: J4.2 90.098,12.12 90.098,13.009 92.837,15.748 92.837,31.115 95.758,34.036 95.758,69.215 v1(98.425,71.882) ; R8a5.1 110.744,82.169 R7a5.1 110.998,85.725 ; v1(110.236,86.614) 110.998,85.852 110.998,85.725 ; R3a5.1 111.633,85.09 110.998,85.725
Vi(E6): J5.2 R3a6.1 R7a6.1 R8a6.1 | length 90.7
  Top Layer w0.9: v2(97.79,48.133) 97.917,48.26 v2(103.251,48.26)
  Bottom Layer w0.9: v2@97.536,48.514 97.536,63.373 101.6,67.437 116.399,67.437 116.429,67.407 118.766,67.407 118.868,67.509 120.511,67.509 126.268,61.752 128.554,61.752 129.6,60.706 130.81,60.706 131.572,59.944 J5.2 ; v2(103.251,48.26) R3a6.1 102.616,51.816 R8a6.1 100.203,37.592 100.965,36.83 102.743,36.83 R7a6.1
Vo: GanIn.2 Jumper6.3 U6.8 U6.9 | length 23.4
  Bottom Layer w0.9: U6.9 U6.8 124.714,34.798 128.397,31.115 Jumper6.3 130.683,25.781 130.683,20.447 129.54,19.304 GanIn.2
Vo(E1): J1.1 Jumper1.3 U1.8 U1.9 | length 18.4
  Bottom Layer w0.9: U1.9 U1.8 46.736,60.833 Jumper1.3 J1.1@46.736,49.276
Vo(E2): J2.1 Jumper2.3 U2.8 U2.9 | length 17.5
  Bottom Layer w0.9: U2.9 U2.8 37.846,16.51 40.005,14.351 Jumper2.3 41.402,10.541 J2.1
Vo(E3): J3.1 Jumper3.3 U3.8 U3.9 | length 19.4
  Bottom Layer w0.9: U3.9 U3.8 87.884,68.961 91.821,65.024 Jumper3.3 91.821,57.404 J3.1
Vo(E4): J4.1 Jumper4.3 U4.8 U4.9 | length 19.7
  Bottom Layer w0.9: U4.9 U4.8 85.598,23.114 89.789,18.923 Jumper4.3 89.789,14.859 86.868,11.938 J4.1
Vo(E5): J5.1 Jumper5.3 U5.8 U5.9 | length 21.7
  Bottom Layer w0.9: U5.9 U5.8 129.794,69.977 133.35,66.421 Jumper5.3 134.112,64.77 J5.1
Vo(J1): Jumper1.2 R5a1.2 R5b.2 R6a1.1 U1.7 | length 40.5
  Bottom Layer w0.9: R5b.2 20.447,57.277 R5a1.2 23.368,57.023 26.924,57.023 ; U1.7 32.639,60.452 R6a1.1 30.353,60.452 26.924,57.023 ; Jumper1.2 44.196,53.848 43.561,53.213 38.1,53.213 35.941,55.372 29.083,55.372 27.432,57.023 26.924,57.023
Vo(J2): Jumper2.2 R5b2.2 R6a2.1 U2.7 | length 35.9
  Bottom Layer w0.9: U2.7 29.188,17.631 R5b2.2 20.193,15.875 R6a2.1 21.59,13.97 21.59,12.954 25.527,9.017 36.703,9.017 37.465,9.779 Jumper2.2
Vo(J3): Jumper3.2 R5b3.2 R6a3.1 U3.7 | length 33.7
  Bottom Layer w0.9: R5b3.2 R6a3.1 ; U3.7 79.375,68.834 76.073,68.834 74.803,67.564 R6a3.1 ; Jumper3.2 89.281,59.436 87.884,58.039 80.01,58.039 74.803,63.246 R6a3.1
Vo(J4): Jumper4.2 R5b4.2 R6a4.1 U4.7 | length 39.2
  Bottom Layer w0.9: U4.7 72.009,25.654 71.374,25.019 R5b4.2 69.215,23.622 R6a4.1 69.215,19.304 70.612,17.907 76.2,17.907 80.391,13.716 86.36,13.716 87.249,14.605 Jumper4.2
Vo(J5): Jumper5.2 R5b5.2 R6a5.1 U5.7 | length 32.6
  Bottom Layer w0.9: U5.7 121.793,76.073 R5b5.2 118.237,75.946 R6a5.1 117.094,73.533 115.697,72.136 115.697,69.977 116.967,68.707 118.227,68.707 118.329,68.809 121.564,68.809 127.321,63.052 129.093,63.052 129.407,62.738 129.921,62.738 130.81,63.627 Jumper5.2
Vo(J6): Jumper6.2 R5b6.2 R6a6.1 U6.7 | length 38.7
  Bottom Layer w0.9: U6.7 113.919,35.306 R6a6.1 111.379,35.56 R5b6.2 108.458,34.925 108.458,29.21 112.903,24.765 124.46,24.765 125.857,26.162 Jumper6.2
VoFinal: ganActive.2 GanIn.3 Vo.1 | length 35.4
  Bottom Layer w0.9: ganActive.2 123.063,19.05 125.349,16.764 GanIn.3 133.477,16.764 140.295,23.582 Vo.1
pads on no net: R25.3 R26.3

## Keep-outs
Keep-Out Layer:
  the board outline again, w0.1